# Altium PCB firmware_board.PcbDoc
Units mm, origin at the board's own origin, x right, y up, seen from the top; angles counter-clockwise.
Board outline 150 x 74.93 mm, 2 copper layers (Top Layer, Bottom Layer); 12 components, 10 nets, 143 pads, 3 vias.
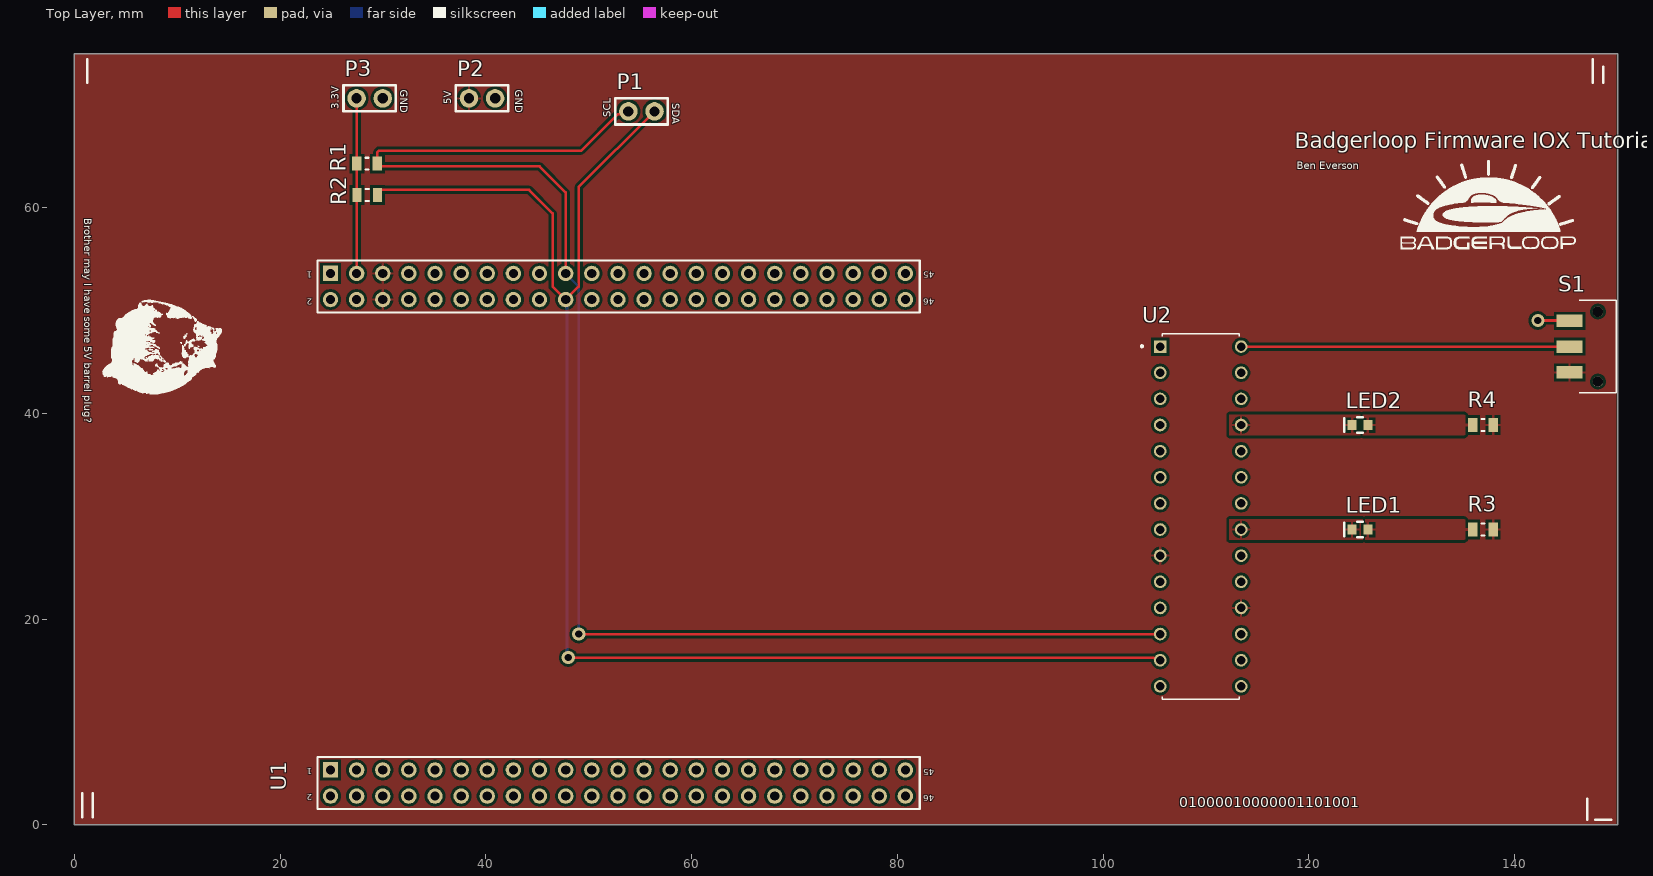
[diagram p0: Top Layer view]
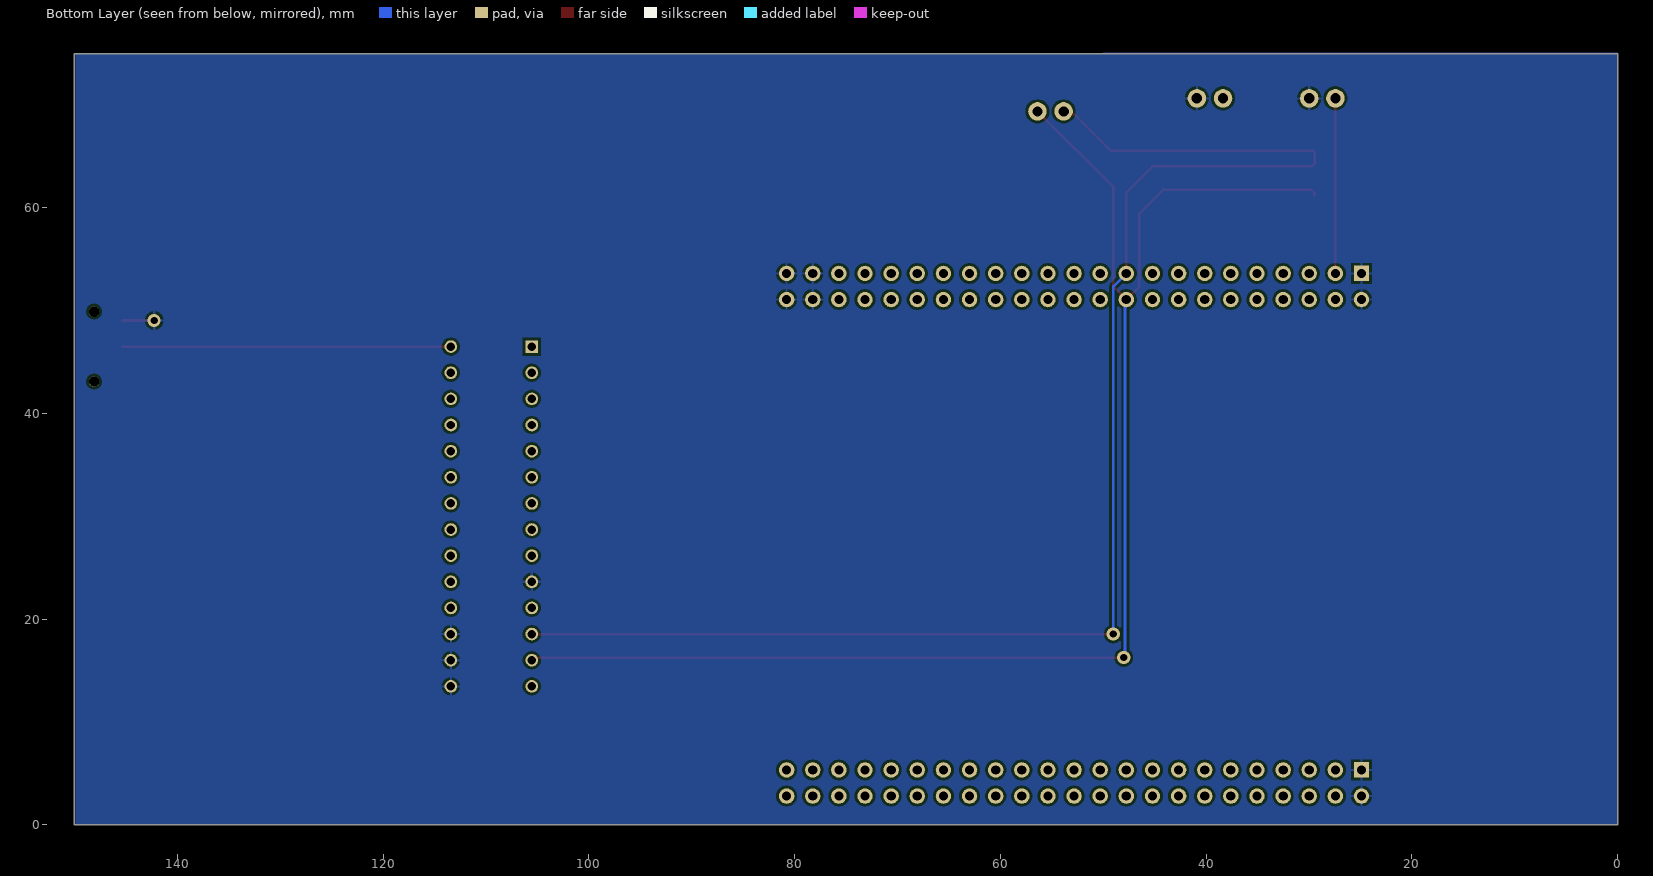
[diagram p1: Bottom Layer view, seen from below]
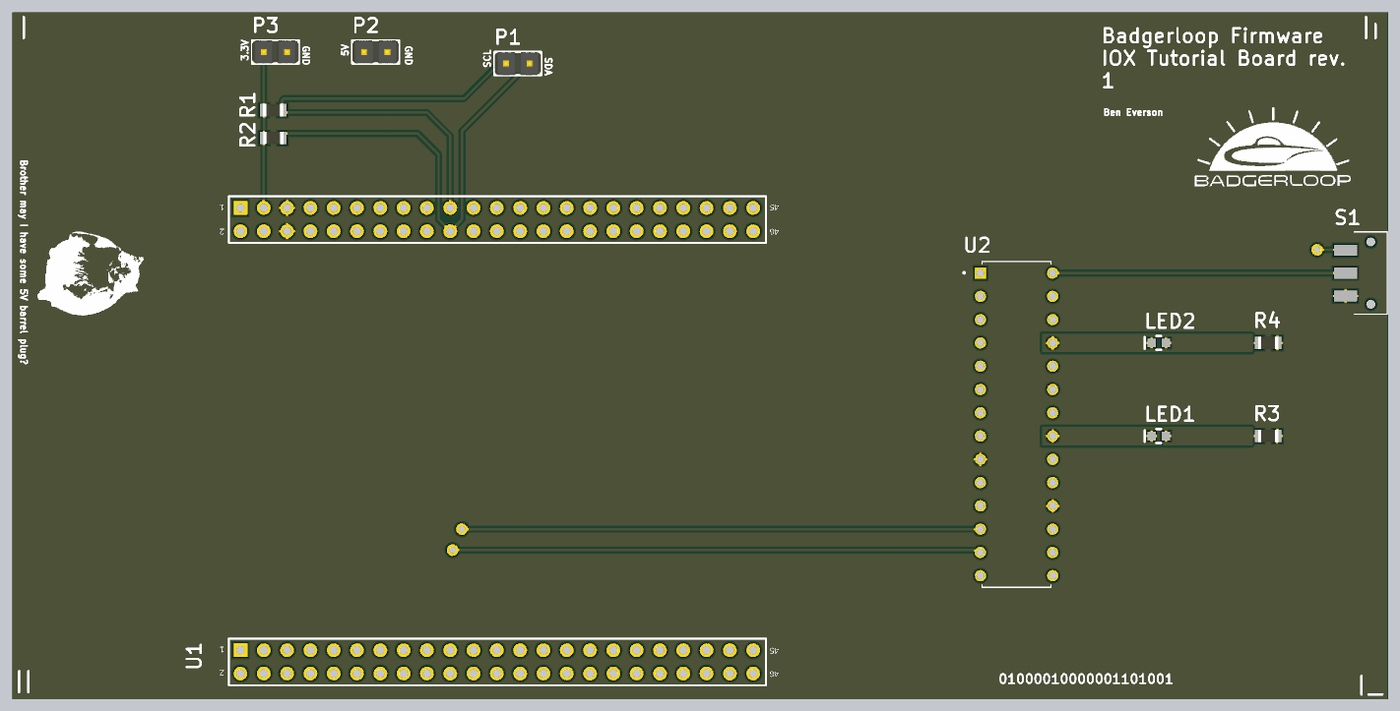
[diagram p2: 3D render of the assembled board from above, using the file's embedded part models]

## Layer stack, top to bottom
Top Solder: solder mask 0.0102, Solder Resist, Dk 3.5
Top Layer: signal copper 0.0356
Dielectric 1: dielectric 0.32, FR-4, Dk 4.8
Bottom Layer: signal copper 0.0356
Bottom Solder: solder mask 0.0102, Solder Resist, Dk 3.5

## Board outline
0,0 0,74.93 150,74.93 150,0

## Design rules (kind name [scope] priority, off if disabled: settings)
Clearance [All] p1: gap=0.254 ignorepadtopadclearanceinfootprint=FALSE except(0: Arc-Hole Track-Hole SMDPad-Hole THPad-Hole Via-Hole Fill-Hole Poly-Hole Region-Hole Text-Hole)
PolygonConnect [All] p1: connectstyle=Relief reliefconductorwidth=0.254 reliefentries=4 polygonreliefangle="90 Angle" airgapwidth=0.254
RoutingVias [All] p1: holewidth=0.711 width=1.27 viastyle="Through Hole" minholewidth=0.711 minwidth=1.27 maxholewidth=0.711 maxwidth=1.27
SolderMaskExpansion [All] p1: expansion=0.102 istentingtop=FALSE
Width [All] p1: maxlimit=0.254 minlimit=0.254 preferedwidth=0.254
30 further rules are at their usual default settings.

## Classes and differential pairs
component class headers: P1 P2 P3
component class iox: U2
component class interface: LED1 LED2 R3 R4 S1
component class beaglebone: R1 R2 U1

## Components (designator, comment, footprint, x,y, rotation, side; value= is the part's Value field where it differs from the comment)
LED1 "LED GREEN 0603" "LED 0603 GREEN" 124.968,28.702 r180 top
LED2 "LED GREEN 0603" "LED 0603 GREEN" 124.968,38.862 r180 top
P1 "Header 2" "Pin Header 1x2 TH Pitch 2.54mm" 56.388,69.342 r180 top
P2 "Header 2" "Pin Header 1x2 TH Pitch 2.54mm" 38.354,70.612 r0 top
P3 "Header 2" "Pin Header 1x2 TH Pitch 2.54mm" 27.432,70.612 r0 top
R1 "10k" SMD-0805-RES 28.448,64.262 r180 top
R2 "10k" SMD-0805-RES 28.464,61.214 r180 top
R3 "100" SMD-0805-RES 136.906,28.702 r180 top
R4 "100" SMD-0805-RES 136.906,38.862 r180 top
S1 "JS102011SAQN" SW_JS102011SAQN 148.082,46.482 r90 top
U1 "BEAGLEBONE Black Rev C Headers" Beaglebone_Topside 24.892,2.794 r90 top
U2 "MCP23017-E/SP" DIP787W45P254L3556H508Q28 109.474,29.972 r0 top

## Footprints (in the part's own frame and the unit in brackets; to place one, negate y for a bottom-side part, rotate by r counter-clockwise, add the part's x,y. Pads: shape width x height; smd on the part's side, far side on the other; paste and mask are expansions set on the pad)
Beaglebone_Topside [mm] "Connector; Header; 24x2 Position"
  rect 1.5x1.5 hole 0.9: 1(50.8,0) 101(2.54,0)
  round 1.5 hole 0.9: 2(48.26,0) 3(50.8,-2.54) 4(48.26,-2.54) 5(50.8,-5.08) 6(48.26,-5.08) 7(50.8,-7.62) 8(48.26,-7.62) 9(50.8,-10.16) 10(48.26,-10.16) 11(50.8,-12.7) 12(48.26,-12.7) 13(50.8,-15.24) 14(48.26,-15.24) 15(50.8,-17.78) 16(48.26,-17.78) 17(50.8,-20.32) 18(48.26,-20.32) 19(50.8,-22.86) 20(48.26,-22.86) 21(50.8,-25.4) 22(48.26,-25.4) 23(50.8,-27.94) 24(48.26,-27.94) 25(50.8,-30.48) 26(48.26,-30.48) 27(50.8,-33.02) 28(48.26,-33.02) 29(50.8,-35.56) 30(48.26,-35.56) 31(50.8,-38.1) 32(48.26,-38.1) 33(50.8,-40.64) 34(48.26,-40.64) 35(50.8,-43.18) 36(48.26,-43.18) 37(50.8,-45.72) 38(48.26,-45.72) 39(50.8,-48.26) 40(48.26,-48.26) 41(50.8,-50.8) 42(48.26,-50.8) 43(50.8,-53.34) 44(48.26,-53.34) 45(50.8,-55.88) 46(48.26,-55.88) 102(0,0) 103(2.54,-2.54) 104(0,-2.54) 105(2.54,-5.08) 106(0,-5.08) 107(2.54,-7.62) 108(0,-7.62) 109(2.54,-10.16) 110(0,-10.16) 111(2.54,-12.7) 112(0,-12.7) 113(2.54,-15.24) 114(0,-15.24) 115(2.54,-17.78) 116(0,-17.78) 117(2.54,-20.32) 118(0,-20.32) 119(2.54,-22.86) 120(0,-22.86) 121(2.54,-25.4) 122(0,-25.4) 123(2.54,-27.94) 124(0,-27.94) 125(2.54,-30.48) 126(0,-30.48) 127(2.54,-33.02) 128(0,-33.02) 129(2.54,-35.56) 130(0,-35.56) 131(2.54,-38.1) 132(0,-38.1) 133(2.54,-40.64) 134(0,-40.64) 135(2.54,-43.18) 136(0,-43.18) 137(2.54,-45.72) 138(0,-45.72) 139(2.54,-48.26) 140(0,-48.26) 141(2.54,-50.8) 142(0,-50.8) 143(2.54,-53.34) 144(0,-53.34) 145(2.54,-55.88) 146(0,-55.88)
  silkscreen extent -1.27,-57.28 52.07,1.27, body extent -1.82,-66.55 52.79,22.35, height 15.24
DIP787W45P254L3556H508Q28 [mm]
  rect 1.23x1.23 hole 0.82: 1(-3.935,16.51)
  round 1.23 hole 0.82: 2(-3.935,13.97) 3(-3.935,11.43) 4(-3.935,8.89) 5(-3.935,6.35) 6(-3.935,3.81) 7(-3.935,1.27) 8(-3.935,-1.27) 9(-3.935,-3.81) 10(-3.935,-6.35) 11(-3.935,-8.89) 12(-3.935,-11.43) 13(-3.935,-13.97) 14(-3.935,-16.51) 15(3.935,-16.51) 16(3.935,-13.97) 17(3.935,-11.43) 18(3.935,-8.89) 19(3.935,-6.35) 20(3.935,-3.81) 21(3.935,-1.27) 22(3.935,1.27) 23(3.935,3.81) 24(3.935,6.35) 25(3.935,8.89) 26(3.935,11.43) 27(3.935,13.97) 28(3.935,16.51)
  silkscreen extent -5.81,-17.78 3.75,17.78
"LED 0603 GREEN" [mm] "Chip Diode, 2-Leads, Body 1.60x0.80mm, IPC Medium Density"
  rect 0.9x0.95 smd: 1(-0.775,0) 2(0.775,0)
  silkscreen extent -0.25,-0.76 1.52,0.76, body extent -0.8,-0.4 0.8,0.4, height 0.8
"Pin Header 1x2 TH Pitch 2.54mm" [mm] "PinHeader 1x2 TH Pitch 2.54mm"
  round 1.8 hole 1: 1(0,0) 2(2.54,0)
  silkscreen extent -1.27,-1.27 3.81,1.27, body extent -1.27,-1.27 3.81,1.27, height 9.5
SMD-0805-RES [mm]
  rect 0.9x1.35 smd: 1(-1,0) 2(1,0)
  silkscreen extent -0.15,-0.58 0.15,0.58, body extent -1.1,-0.67 1.1,0.67, height 0.5
SW_JS102011SAQN [mm]
  rect 1.2x2.5 smd: 1(-2.5,2.75) 2(0,2.75) 3(2.5,2.75)
  round 1 hole 1 unplated: ""(-3.4,0) ""(3.4,0)
  silkscreen extent -4.5,-1.8 4.5,1.8

## Part data
LED1 LED2: Color=GREEN, Manufacturer="Lite-On Inc.", Manufacturer P/N=LTST-C190KGKT, Package / Case=0603, Digikey P/N=160-1435-1-ND
P1 P2 P3: "Header, 2-Pin", LatestRevisionDate=17-Jul-2002, LatestRevisionNote="Re-released for DXP Platform.", Publisher="Altium Limited"
R1 R2: library part ERJ-6ENF1002V, "RES SMD 10K OHM 1% 1/8W 0805", Digi-Key Part Number=P10.0KCCT-ND, Manufacturer="Panasonic Electronic Components", Operating Temperature="-55°C ~ 155°C", Package / Case="0805 (2012 Metric)", Power (Watts)="0.125W, 1/8W", Supplier Device Package=0805, Temperature Coefficient=±100ppm/°C, Tolerance=±1%, @ qty=1500, Composition="Thick Film", Datasheets=http://industrial.panasonic.com/www-cgi/jvcr13pz.cgi?E+PZ+3+AOA0002+ERJ6ENF1002V+7+WW, Factory Stock=0, Failure Rate=-, Features="Automotive AEC-Q200", Height - Seated (Max)="0.028\" (0.70mm)", Image=//media.digikey.com/Renders/Panasonic%20Renders/ERJ-0805%20Pkg.jpg, Minimum Quantity=1, Number of Terminations=2, Packaging="Cut Tape (CT)", Part Number=ERJ-6ENF1002V, Part Status=Active, Quantity Available=3985614, Series=ERJ, Size / Dimension="0.079\" L x 0.049\" W (2.00mm x 1.25mm)", Unit Price (USD)=0.00729
R3 R4: library part ERJ-6ENF1000V, "RES SMD 100 OHM 1% 1/8W 0805", Digi-Key Part Number=P100CCT-ND, Manufacturer="Panasonic Electronic Components", Operating Temperature="-55°C ~ 155°C", Package / Case="0805 (2012 Metric)", Power (Watts)="0.125W, 1/8W", Supplier Device Package=0805, Temperature Coefficient=±100ppm/°C, Tolerance=±1%, @ qty=1500, Composition="Thick Film", Datasheets=http://industrial.panasonic.com/www-cgi/jvcr13pz.cgi?E+PZ+3+AOA0002+ERJ6ENF1000V+7+WW, Factory Stock=0, Failure Rate=-, Features="Automotive AEC-Q200", Height - Seated (Max)="0.028\" (0.70mm)", Image=//media.digikey.com/Renders/Panasonic%20Renders/ERJ-0805%20Pkg.jpg, Minimum Quantity=1, Number of Terminations=2, Packaging="Cut Tape (CT)", Part Number=ERJ-6ENF1000V, Part Status=Active, Quantity Available=288663, Series=ERJ, Size / Dimension="0.079\" L x 0.049\" W (2.00mm x 1.25mm)", Unit Price (USD)=0.00729
S1: "Slide Switch SPDT Surface Mount, Right Angle", Package=None, Availability=Unavailable, MF=C&K, MP=JS102011SAQN, Price=None, SnapEDA_Link=https://www.snapeda.com/parts/JS102011SAQN/C%26K/view-part/214325/?ref=snap
U1: library part Beaglebone, "KIT DEV BEAGLEBONE BLACK REV C. Header Breakout", Manufacturer P/N="Beaglebone Black REV C", ComponentLink1Description=Digikey, ComponentLink1URL=https://www.digikey.com/product-detail/en/ghi-electronics-llc/BBB01-SC-505/BBB01-SC-505-ND/6210999, Datasheet=https://media.digikey.com/pdf/Data%20Sheets/Circuitco%20Elect/BB-BBLK-000%20Manual.pdf, Digikey Link=https://www.digikey.com/product-detail/en/ghi-electronics-llc/BBB01-SC-505/BBB01-SC-505-ND/6210999, Digikey P/N=BBB01-SC-505-ND, Manufactuer=Beaglebone
U2: "I/O Expander 16 IÂ²C 1.7MHz 28-SPDIP", Package="DIP-28 Microchip", Availability=Unavailable, MF=Microchip, MP=MCP23017-E/SP, Price=None, SnapEDA_Link=https://www.snapeda.com/parts/MCP23017-E/SP/Microchip/view-part/48605/?ref=snap

## Via types
v1: diameter 1.27, hole 0.711, Top Layer to Bottom Layer, 3 vias

## Nets (pads, with @x,y where several pads share a name; then routed paths per layer and width w, separated by ;. In a path a pad name is that pad's centre, name@x,y a point inside that pad or via, vN(x,y) a via of type N, cw(c..) or ccw(c..) an arc to the next point about the centre after c; other vN are vias at no path point)
GND: P2.2 P3.2 S1.3 U1.1 U1.2 U1.43 U1.44 U1.45 U1.46 U1.101 U1.102 U2.10 U2.15 U2.16 U2.17 | length 3.1
  Top Layer w0.254: v1(142.24,49.022) 145.292,49.022 S1.3
I2C2_SCL: P1.2 R1.1 U1.19 U2.12 | length 146.4
  Top Layer w0.254: U1.19 47.752,61.468 45.212,64.008 29.702,64.008 R1.1 29.448,65.383 29.597,65.532 49.276,65.532 52.815,69.071 53.577,69.071 P1.2 ; v1@49.171,18.542 U2.12
  Bottom Layer w0.254: U1.19 49.022,52.324 v1(49.022,18.542)
I2C2_SDA: P1.1 R2.1 U1.20 U2.13 | length 141.7
  Top Layer w0.254: R2.1 29.464,61.399 29.787,61.722 44.196,61.722 46.482,59.436 46.482,52.324 U1.20 49.022,52.324 49.022,61.976 P1.1 ; v1@47.901,16.256 v1(48.006,16.256) 104.902,16.256 104.969,16.189 105.352,16.189 U2.13
  Bottom Layer w0.254: U1.20 47.879,50.927 47.879,16.383 v1(48.006,16.256)
LED1_AN: LED1.1 R3.2
LED1_CATH: LED1.2 U2.21
LED2_AN: LED2.1 R4.2
LED2_CATH: LED2.2 U2.25
SW: S1.2 U2.28 | length 31.9
  Top Layer w0.254: U2.28 S1.2
V-POS3.3V: P3.1 R1.2 R2.2 U1.3 | length 17
  Top Layer w0.254: U1.3 27.432,61.976 27.448,61.992 27.448,64.008 27.432,64.024 P3.1
V-POS5V: P2.1 R3.1 R4.1 S1.1 U1.5 U1.6 U2.9 U2.18
pads on no net: S1. U1.4 U1.7 U1.8 U1.9 U1.10 U1.11 U1.12 U1.13 U1.14 U1.15 U1.16 U1.17 U1.18 U1.21 U1.22 U1.23 U1.24 U1.25 U1.26 U1.27 U1.28 U1.29 U1.30 U1.31 U1.32 U1.33 U1.34 U1.35 U1.36 U1.37 U1.38 U1.39 U1.40 U1.41 U1.42 U1.103 U1.104 U1.105 U1.106 U1.107 U1.108 U1.109 U1.110 U1.111 U1.112 U1.113 U1.114 U1.115 U1.116 U1.117 U1.118 U1.119 U1.120 U1.121 U1.122 U1.123 U1.124 U1.125 U1.126 U1.127 U1.128 U1.129 U1.130 U1.131 U1.132 U1.133 U1.134 U1.135 U1.136 U1.137 U1.138 U1.139 U1.140 U1.141 U1.142 U1.143 U1.144 U1.145 U1.146 U2.1 U2.2 U2.3 U2.4 U2.5 U2.6 U2.7 U2.8 U2.11 U2.14 U2.19 U2.20 U2.22 U2.23 U2.24 U2.26 U2.27

## Polygon pours and split planes (outlines as drawn)
V-POS5V on Top Layer "V-POS5V_L01_P008" (solid, pour order 8): 0,74.93 149.86,74.93 149.86,0 0,0
LED2_AN on Top Layer "LED2_AN_L01_P002" (solid, pour order 2): 124.968,39.878 124.968,37.846 136.906,37.846 136.906,39.878
LED1_AN on Top Layer "LED1_AN_L01_P003" (solid, pour order 3): 124.968,29.718 124.968,27.94 125.222,27.686 136.906,27.686 136.906,29.718
LED2_CATH on Top Layer "LED2_CATH_L01_P001" (solid, pour order 1): 112.268,39.878 112.268,37.846 124.968,37.846 124.968,39.878
LED1_CATH on Top Layer "LED1_CATH_L01_P000" (solid, pour order 0): 112.268,29.718 112.268,27.686 125.222,27.686 125.222,29.718
GND on Bottom Layer "GND_L02_P007" (solid, pour order 7): 0,75.081 0,0 149.86,0 149.86,74.93

## Silkscreen, mask and mechanical layers (free items; w line width, h text height)
Top Overlay:
  drawing of 73 lines, arcs and shapes, not listed
  text "GND" at 31.696,71.428 h0.7 r270
  text "GND" at 42.872,71.428 h0.7 r270
  text "SDA" at 58.112,70.158 h0.7 r270
  text "5V" at 36.63,70.05 h0.7 r90
  text "3.3V" at 25.708,69.542 h0.7 r90
  text "SCL" at 52.124,68.78 h0.7 r90
  text "Badgerloop Firmware IOX Tutorial Board rev. 1" at 118.618,65.786 h1.52
  text "Ben Everson" at 118.818,63.7 h0.7
  text "Brother may I have some 5V barrel plug?" at 0.941,58.982 h0.7 r270
  text "01000010000001101001" at 107.388,1.724 h1

## Text inside footprints (layer, text, board x,y; h text height)
U1: Top Overlay "2" at 23.114,3.175 h1.02 r180; Top Overlay "1" at 23.114,5.715 h1.02 r180; Top Overlay "46" at 83.566,3.048 h1.02 r180; Top Overlay "45" at 83.566,5.588 h1.02 r180; Top Overlay "45" at 83.566,53.975 h1.02 r180; Top Overlay "46" at 83.566,51.308 h1.02 r180; Top Overlay "1" at 23.114,53.975 h1.02 r180; Top Overlay "2" at 23.114,51.308 h1.02 r180